# Altium PCB SolarArray4.PcbDoc
Units mm, origin at the board's own origin, x right, y up, seen from the top; angles counter-clockwise.
Board outline 82 x 320 mm, 2 copper layers (Top Layer, Bottom Layer), stack 1.567 mm thick; 67 components, 37 nets, 167 pads, 3 vias.
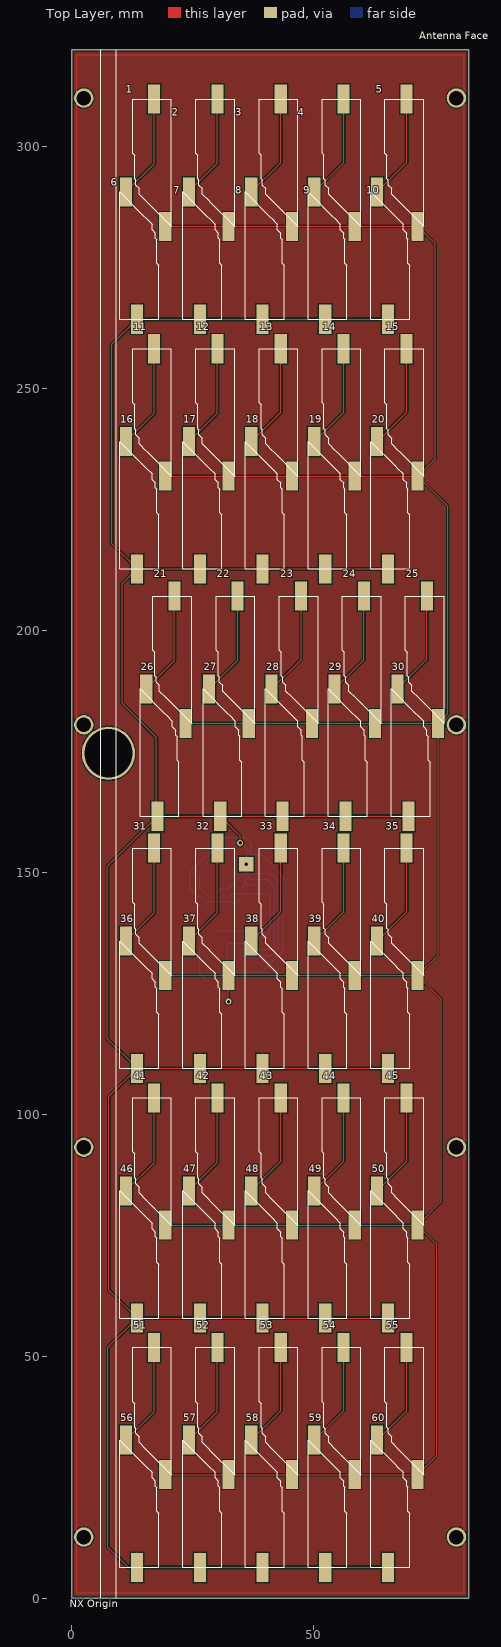
[diagram p0: Top Layer view]
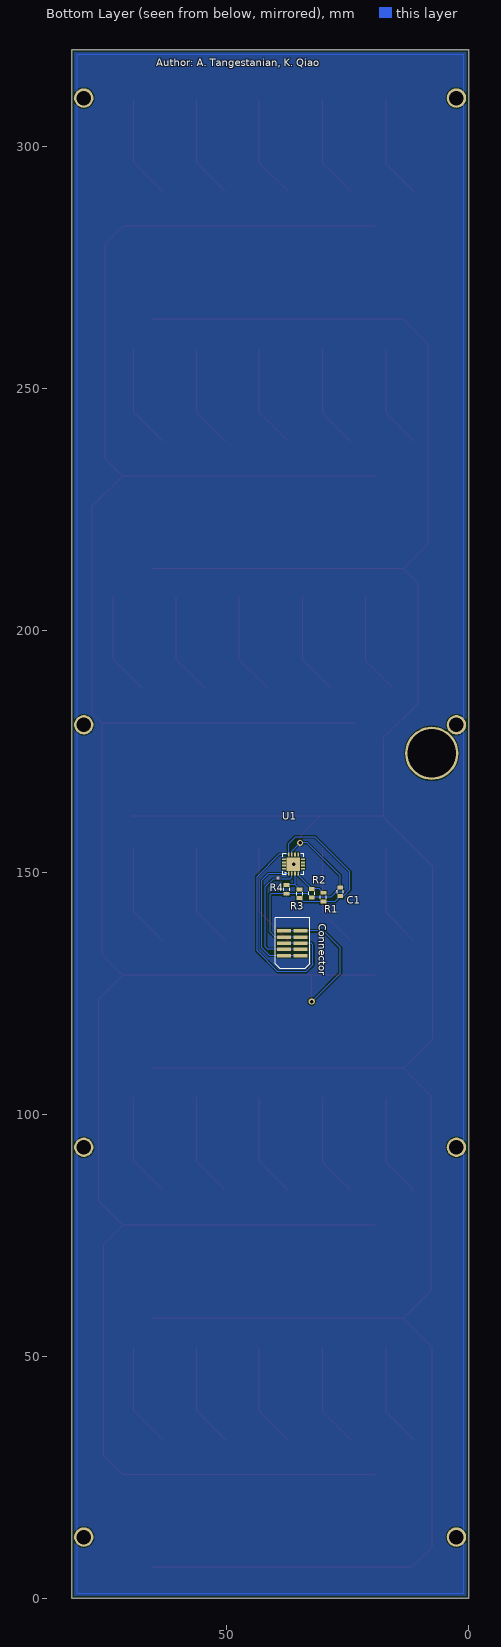
[diagram p1: Bottom Layer view, seen from below]
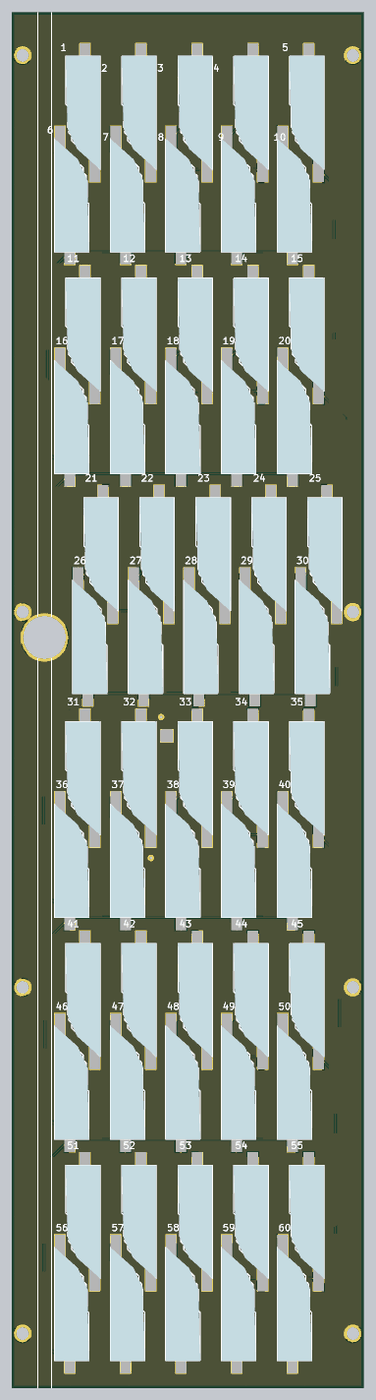
[diagram p2: 3D render of the assembled board from above, using the file's embedded part models]

## Layer stack, top to bottom
Top Solder: solder mask 0.0102, Solder Resist, Dk 3.5
Top Layer: signal copper 0.0356
Dielectric 1: dielectric 1.4961, FR-4, Dk 4.8
Bottom Layer: signal copper 0.0356
Bottom Solder: solder mask 0.0102, Solder Resist, Dk 3.5

## Board outline
82,0 82,320 0,320 0,0

## Design rules (kind name [scope] priority, off if disabled: settings)
Clearance [All] p1: gap=0.254 ignorepadtopadclearanceinfootprint=FALSE except(0: Arc-Hole Track-Hole SMDPad-Hole THPad-Hole Via-Hole Fill-Hole Poly-Hole Region-Hole Text-Hole)
PolygonConnect [All] p1: connectstyle=Relief reliefconductorwidth=0.254 reliefentries=4 polygonreliefangle="90 Angle" airgapwidth=0.254
RoutingVias [All] p1: holewidth=0.711 width=1.27 viastyle="Through Hole" minholewidth=0.711 minwidth=1.27 maxholewidth=0.711 maxwidth=1.27
SolderMaskExpansion [All] p1: expansion=0.102
Width [All] p1: maxlimit=1 minlimit=0.254 preferedwidth=0.254 minimp=50.000000 maximp=50.000000 favimp=50.000000
30 further rules are at their usual default settings.

## Components (designator, comment, footprint, x,y, rotation, side; value= is the part's Value field where it differs from the comment)
1 "Trisol X Solar Wing" PCBComponent_1 20.6,280.336 r90 top
2 "Trisol X Solar Wing" PCBComponent_1 33.656,280.336 r90 top
3 "Trisol X Solar Wing" PCBComponent_1 46.756,280.336 r90 top
4 "Trisol X Solar Wing" PCBComponent_1 59.756,280.336 r90 top
5 "Trisol X Solar Wing" PCBComponent_1 72.766,280.336 r90 top
6 "Trisol X Solar Wing" PCBComponent_1 9.944,293.764 r270 top
7 "Trisol X Solar Wing" PCBComponent_1 22.944,293.764 r270 top
8 "Trisol X Solar Wing" PCBComponent_1 35.844,293.764 r270 top
9 "Trisol X Solar Wing" PCBComponent_1 48.844,293.764 r270 top
10 "Trisol X Solar Wing" PCBComponent_1 61.844,293.764 r270 top
11 "Trisol X Solar Wing" PCBComponent_1 20.6,228.736 r90 top
12 "Trisol X Solar Wing" PCBComponent_1 33.656,228.736 r90 top
13 "Trisol X Solar Wing" PCBComponent_1 46.756,228.736 r90 top
14 "Trisol X Solar Wing" PCBComponent_1 59.756,228.736 r90 top
15 "Trisol X Solar Wing" PCBComponent_1 72.766,228.736 r90 top
16 "Trisol X Solar Wing" PCBComponent_1 9.944,242.164 r270 top
17 "Trisol X Solar Wing" PCBComponent_1 22.944,242.164 r270 top
18 "Trisol X Solar Wing" PCBComponent_1 35.844,242.164 r270 top
19 "Trisol X Solar Wing" PCBComponent_1 48.844,242.164 r270 top
20 "Trisol X Solar Wing" PCBComponent_1 61.844,242.164 r270 top
21 "Trisol X Solar Wing" PCBComponent_1 24.8,177.636 r90 top
22 "Trisol X Solar Wing" PCBComponent_1 37.856,177.636 r90 top
23 "Trisol X Solar Wing" PCBComponent_1 50.956,177.636 r90 top
24 "Trisol X Solar Wing" PCBComponent_1 63.956,177.636 r90 top
25 "Trisol X Solar Wing" PCBComponent_1 76.966,177.636 r90 top
26 "Trisol X Solar Wing" PCBComponent_1 14.144,191.064 r270 top
27 "Trisol X Solar Wing" PCBComponent_1 27.144,191.064 r270 top
28 "Trisol X Solar Wing" PCBComponent_1 40.044,191.064 r270 top
29 "Trisol X Solar Wing" PCBComponent_1 53.044,191.064 r270 top
30 "Trisol X Solar Wing" PCBComponent_1 66.044,191.064 r270 top
31 "Trisol X Solar Wing" PCBComponent_1 20.6,125.536 r90 top
32 "Trisol X Solar Wing" PCBComponent_1 33.656,125.536 r90 top
33 "Trisol X Solar Wing" PCBComponent_1 46.756,125.536 r90 top
34 "Trisol X Solar Wing" PCBComponent_1 59.756,125.536 r90 top
35 "Trisol X Solar Wing" PCBComponent_1 72.766,125.536 r90 top
36 "Trisol X Solar Wing" PCBComponent_1 9.944,138.964 r270 top
37 "Trisol X Solar Wing" PCBComponent_1 22.944,138.964 r270 top
38 "Trisol X Solar Wing" PCBComponent_1 35.844,138.964 r270 top
39 "Trisol X Solar Wing" PCBComponent_1 48.844,138.964 r270 top
40 "Trisol X Solar Wing" PCBComponent_1 61.844,138.964 r270 top
41 "Trisol X Solar Wing" PCBComponent_1 20.6,73.936 r90 top
42 "Trisol X Solar Wing" PCBComponent_1 33.656,73.936 r90 top
43 "Trisol X Solar Wing" PCBComponent_1 46.756,73.936 r90 top
44 "Trisol X Solar Wing" PCBComponent_1 59.756,73.936 r90 top
45 "Trisol X Solar Wing" PCBComponent_1 72.766,73.936 r90 top
46 "Trisol X Solar Wing" PCBComponent_1 9.944,87.364 r270 top
47 "Trisol X Solar Wing" PCBComponent_1 22.944,87.364 r270 top
48 "Trisol X Solar Wing" PCBComponent_1 35.844,87.364 r270 top
49 "Trisol X Solar Wing" PCBComponent_1 48.844,87.364 r270 top
50 "Trisol X Solar Wing" PCBComponent_1 61.844,87.364 r270 top
51 "Trisol X Solar Wing" PCBComponent_1 20.6,22.376 r90 top
52 "Trisol X Solar Wing" PCBComponent_1 33.656,22.376 r90 top
53 "Trisol X Solar Wing" PCBComponent_1 46.756,22.376 r90 top
54 "Trisol X Solar Wing" PCBComponent_1 59.756,22.376 r90 top
55 "Trisol X Solar Wing" PCBComponent_1 72.766,22.376 r90 top
56 "Trisol X Solar Wing" PCBComponent_1 9.944,35.864 r270 top
57 "Trisol X Solar Wing" PCBComponent_1 22.944,35.864 r270 top
58 "Trisol X Solar Wing" PCBComponent_1 35.844,35.864 r270 top
59 "Trisol X Solar Wing" PCBComponent_1 48.844,35.864 r270 top
60 "Trisol X Solar Wing" PCBComponent_1 61.844,35.864 r270 top
C1 "100pF" 0805 26.5,146 r270 bottom
Connector "TFC-105-02-F-D" TFC-105-X2-XX-D 36.414,135.36 r270 bottom
R1 "1K" 0805 30,144.9 r270 bottom
R2 "1K" 0805 32.4,145.7 r270 bottom
R3 "1K" 0805 34.9,145.6 r270 bottom
R4 "1K" 0805 37.6,146.5 r270 bottom
U1 "ADT7420UCPZ-R2" CP_16_17 36.175,151.731 r90 bottom

## Footprints (in the part's own frame and the unit in brackets; to place one, negate y for a bottom-side part, rotate by r counter-clockwise, add the part's x,y. Pads: shape width x height; smd on the part's side, far side on the other; paste and mask are expansions set on the pad)
0805 [mil]
  rect 32x48 smd: 1(-35.43,0) 2(36,0)
  silkscreen extent -12,-24 12,24
CP_16_17 [mil]
  rect 30x14 smd: 1(-77.5,38.39) 2(-77.5,12.8) 3(-77.5,-12.8) 4(-77.5,-38.39) 9(77.5,-38.39) 10(77.5,-12.8) 11(77.5,12.8) 12(77.5,38.39)
  rect 14x30 smd: 5(-38.39,-77.5) 6(-12.8,-77.5) 7(12.8,-77.5) 8(38.39,-77.5) 13(38.39,77.5) 14(12.8,77.5) 15(-12.8,77.5) 16(-38.39,77.5)
  rect 110x110 smd paste-54.5: 17(0,0)
  silkscreen extent -86,-86 86,86, body extent -81,-81 81,81, height 30
PCBComponent_1 [mm]
  rect 6x2.5 smd: 0(3.164,1.27) 1(29.464,3.556)
  silkscreen extent 3.16,0 29.46,8.03, body extent 3.16,0.06 29.46,8.06, height 0.32
TFC-105-X2-XX-D [mil]
  rect 29x115 smd mask+2: 1(-100,-67.5) 2(-100,67.5) 3(-50,-67.5) 4(-50,67.5) 5(0,-67.5) 6(0,67.5) 7(50,-67.5) 8(50,67.5) 9(100,-67.5) 10(100,67.5)
  silkscreen extent -208,-140 208,140, body extent -192,-122 183,113, height 220

## Part data
C1: library part CAP0805_1nF
R1 R2 R3 R4: library part RESISTOR0805-RES_1K
U1: "Imported"

## Free pads (board coordinates)
  round 4 hole 3: 1(2.5,12.65) 1(2.5,93.2) 1(2.5,180.5) 1(2.5,310) 1(79.5,12.65) 1(79.5,93.2) 1(79.5,180.5) 1(79.5,310)
  round 11 hole 10: 2(7.6,174.6)
  rect 3x3 smd: 3(36.1,151.7)

## Via types
v1: diameter 1.27, hole 0.711, Top Layer to Bottom Layer, 3 vias

## Nets (pads, with @x,y where several pads share a name; then routed paths per layer and width w, separated by ;. In a path a pad name is that pad's centre, name@x,y a point inside that pad or via, vN(x,y) a via of type N, cw(c..) or ccw(c..) an arc to the next point about the centre after c; other vN are vias at no path point)
Net1_0: 1.0 2.0 3.0 4.0 5.0 11.0 12.0 13.0 14.0 15.0 21.0 22.0 23.0 24.0 25.0 31.0 32.0 33.0 34.0 35.0 41.0 42.0 43.0 44.0 45.0 51.0 52.0 53.0 54.0 55.0 Connector.1 Connector.2 | length 618.4
  Top Layer w0.254: 51.0 52.0 53.0 54.0 55.0 75.4,29.444 75.4,73.196 45.0 ; 41.0 42.0 43.0 44.0 45.0 ; 31.0 32.0 ; 11.0 12.0 13.0 14.0 15.0 ; 1.0 2.0 3.0 4.0 5.0 75.1,279.896 75.1,235.504 15.0 ; 21.0 22.0 23.0 24.0 25.0 ; v1(32.4,123.3) 32.386,123.314 32.0 ; 32.0 33.0 34.0 35.0 ; 45.0 76.4,82.004 76.4,123.796 35.0 ; 35.0 75.696,132.9 25.0 ; 15.0 77.7,225.696 77.7,182.804 25.0
  Bottom Layer w0.254: v1(32.4,123.3) 26.5,129.2 26.5,134.4 30,137.9 Connector.2 Connector.1
Net1_1: 1.1 6.0 | length 21.6
  Top Layer w0.254: 6.0 17.044,296.43 1.1
Net2_1: 2.1 7.0 | length 21.6
  Top Layer w0.254: 7.0 30.1,296.486 2.1
Net3_1: 3.1 8.0 | length 21.7
  Top Layer w0.254: 8.0 43.2,296.686 3.1
Net4_1: 4.1 9.0 | length 21.7
  Top Layer w0.254: 9.0 56.2,296.686 4.1
Net5_1: 5.1 10.0 | length 21.7
  Top Layer w0.254: 10.0 69.21,296.696 5.1
Net6_1: 6.1 7.1 8.1 9.1 10.1 16.1 17.1 18.1 19.1 20.1 26.1 27.1 28.1 29.1 30.1 36.1 37.1 38.1 39.1 40.1 46.1 47.1 48.1 49.1 50.1 56.1 57.1 58.1 59.1 60.1 C1.1 Connector.3 Connector.4 pad.3 R2.2 R4.2 U1.11 U1.17 | length 649.6
  Top Layer w0.254: v1(34.8,156.1) 34.8,157.5 27.1 ; 60.1 59.1 58.1 57.1 56.1 11.7,6.4 7.5,10.6 7.5,51.9 46.1 ; 50.1 49.1 48.1 47.1 46.1 ; 40.1 39.1 38.1 37.1 36.1 ; 20.1 19.1 18.1 17.1 16.1 ; 10.1 9.1 8.1 7.1 6.1 8.3,259.1 8.3,217.9 16.1 ; 30.1 29.1 28.1 27.1 ; 46.1 7.7,63.7 7.7,103.7 36.1 ; 36.1 7.4,115.6 7.4,151.3 26.1 ; 16.1 10.4,209.6 10.4,185 17.5,177.9 17.5,161.8 26.1 ; 26.1 27.1
  Bottom Layer w0.254: Connector.4 Connector.3 39.93,136.63 41,137.7 41,145.4 40.814,145.586 R4.2 33.2,145.586 R2.2 32.286,144.9 28.5,144.9 C1.1 26.5,149.3 33.3,156.1 v1(34.8,156.1) 36.5,154.4 U1.11
  other v1: 36.1,151.7
Net11_1: 11.1 16.0 | length 21.6
  Top Layer w0.254: 16.0 17.044,244.83 11.1
Net12_1: 12.1 17.0 | length 21.6
  Top Layer w0.254: 17.0 30.1,244.886 12.1
Net13_1: 13.1 18.0 | length 21.7
  Top Layer w0.254: 18.0 43.2,245.086 13.1
Net14_1: 14.1 19.0 | length 21.7
  Top Layer w0.254: 19.0 56.2,245.086 14.1
Net15_1: 15.1 20.0 | length 21.7
  Top Layer w0.254: 20.0 69.21,245.096 15.1
Net21_1: 21.1 26.0 | length 21.6
  Top Layer w0.254: 26.0 21.244,193.73 21.1
Net22_1: 22.1 27.0 | length 21.6
  Top Layer w0.254: 27.0 34.3,193.786 22.1
Net23_1: 23.1 28.0 | length 21.7
  Top Layer w0.254: 28.0 47.4,193.986 23.1
Net24_1: 24.1 29.0 | length 21.7
  Top Layer w0.254: 29.0 60.4,193.986 24.1
Net25_1: 25.1 30.0 | length 21.7
  Top Layer w0.254: 30.0 73.41,193.996 25.1
Net31_1: 31.1 36.0 | length 21.6
  Top Layer w0.254: 36.0 17.044,141.63 31.1
Net32_1: 32.1 37.0 | length 21.6
  Top Layer w0.254: 37.0 30.1,141.686 32.1
Net33_1: 33.1 38.0 | length 21.7
  Top Layer w0.254: 38.0 43.2,141.886 33.1
Net34_1: 34.1 39.0 | length 21.7
  Top Layer w0.254: 39.0 56.2,141.886 34.1
Net35_1: 35.1 40.0 | length 21.7
  Top Layer w0.254: 40.0 69.21,141.896 35.1
Net41_1: 41.1 46.0 | length 21.6
  Top Layer w0.254: 46.0 17.044,90.03 41.1
Net42_1: 42.1 47.0 | length 21.6
  Top Layer w0.254: 47.0 30.1,90.086 42.1
Net43_1: 43.1 48.0 | length 21.7
  Top Layer w0.254: 48.0 43.2,90.286 43.1
Net44_1: 44.1 49.0 | length 21.7
  Top Layer w0.254: 49.0 56.2,90.286 44.1
Net45_1: 45.1 50.0 | length 21.7
  Top Layer w0.254: 50.0 69.21,90.296 45.1
Net51_1: 51.1 56.0 | length 21.6
  Top Layer w0.254: 56.0 17.044,38.53 51.1
Net52_1: 52.1 57.0 | length 21.6
  Top Layer w0.254: 57.0 30.1,38.586 52.1
Net53_1: 53.1 58.0 | length 21.7
  Top Layer w0.254: 58.0 43.2,38.786 53.1
Net54_1: 54.1 59.0 | length 21.7
  Top Layer w0.254: 59.0 56.2,38.786 54.1
Net55_1: 55.1 60.0 | length 21.7
  Top Layer w0.254: 60.0 69.21,38.796 55.1
NetC1_2: C1.2 Connector.5 Connector.6 R1.2 R3.2 U1.12 | length 81.6
  Bottom Layer w0.254: R3.2 34.2,143.986 R1.2 27.6,143.986 C1.2 25.914,145.086 24.514,146.486 24.514,150.114 31.7,157.3 35.8,157.3 37.15,155.95 U1.12 39.137,153.7 43.7,149.137 43.7,133.8 39.4,129.5 33.6,129.5 32.2,130.9 32.2,135.1 32.46,135.36 Connector.6 Connector.5
NetConnector_7: Connector.7 Connector.8 U1.2 | length 27
  Bottom Layer w0.254: Connector.8 Connector.7 41.49,134.09 42,134.6 42,147 40.4,148.6 36.9,148.6 36.5,149 U1.2
NetConnector_9: Connector.9 Connector.10 U1.1 | length 28.8
  Bottom Layer w0.254: Connector.10 Connector.9 41.12,132.82 42.7,134.4 42.7,148.4 41.337,149.763 U1.1
NetR1_1: R1.1 R2.1 U1.4 | length 7.1
  Bottom Layer w0.254: R1.1 30.8,146.6 R2.1 35.2,149.4 U1.4
NetR3_1: R3.1 R4.1 U1.3 | length 5.5
  Bottom Layer w0.254: R3.1 35.8,147.4 36,147.4 ; U1.3 35.85,147.55 36,147.4 ; R4.1 36,147.4
pads on no net: U1.5 U1.6 U1.7 U1.8 U1.9 U1.10 U1.13 U1.14 U1.15 U1.16

## Polygon pours and split planes (outlines as drawn)
Net6_1 on Top Layer (solid, pour order 6): 0.5,319.5 81.5,319.5 81.5,0.5 0.5,0.5
Net5_1 on Top Layer "Array_pos" (solid, shelved, pour order 2): 1,319 81,319 81,1 1,1
Net6_1 on Bottom Layer (solid, pour order 8): 0.5,319.5 81.5,319.5 81.5,0.5 0.5,0.5
Net6_1 on Bottom Layer "Array_neg" (solid, shelved, pour order 4): 1,319 81,319 81,1 1,1

## Silkscreen, mask and mechanical layers (free items; w line width, h text height)
Top Overlay:
  lines w0.254: 6.011,0 6.011,320 ; 9.21,0 9.21,320
  text "Antenna Face" at 71.8,322.2 h1.52
  text "NX Origin" at -0.4,-1.8 h1.52
Bottom Overlay:
  text "Author: A. Tangestanian, K. Qiao" at 64.55,316.6 h1.52

## Text inside footprints (layer, text, board x,y; h text height)
Connector: Mechanical 1 "J1" at 41.19,135.806 h0.76 r90
U1: Bottom Overlay "*" at 38.334,148.302 h1.52 r270